# Altium PCB mcu.PcbDoc
Units mm, origin at the board's own origin, x right, y up, seen from the top; angles counter-clockwise.
Board outline 100 x 100 mm, 2 copper layers (Top Layer, Bottom Layer); 49 components, 82 nets, 308 pads, 0 vias.
Unrouted connection lines stored in the file: 205.
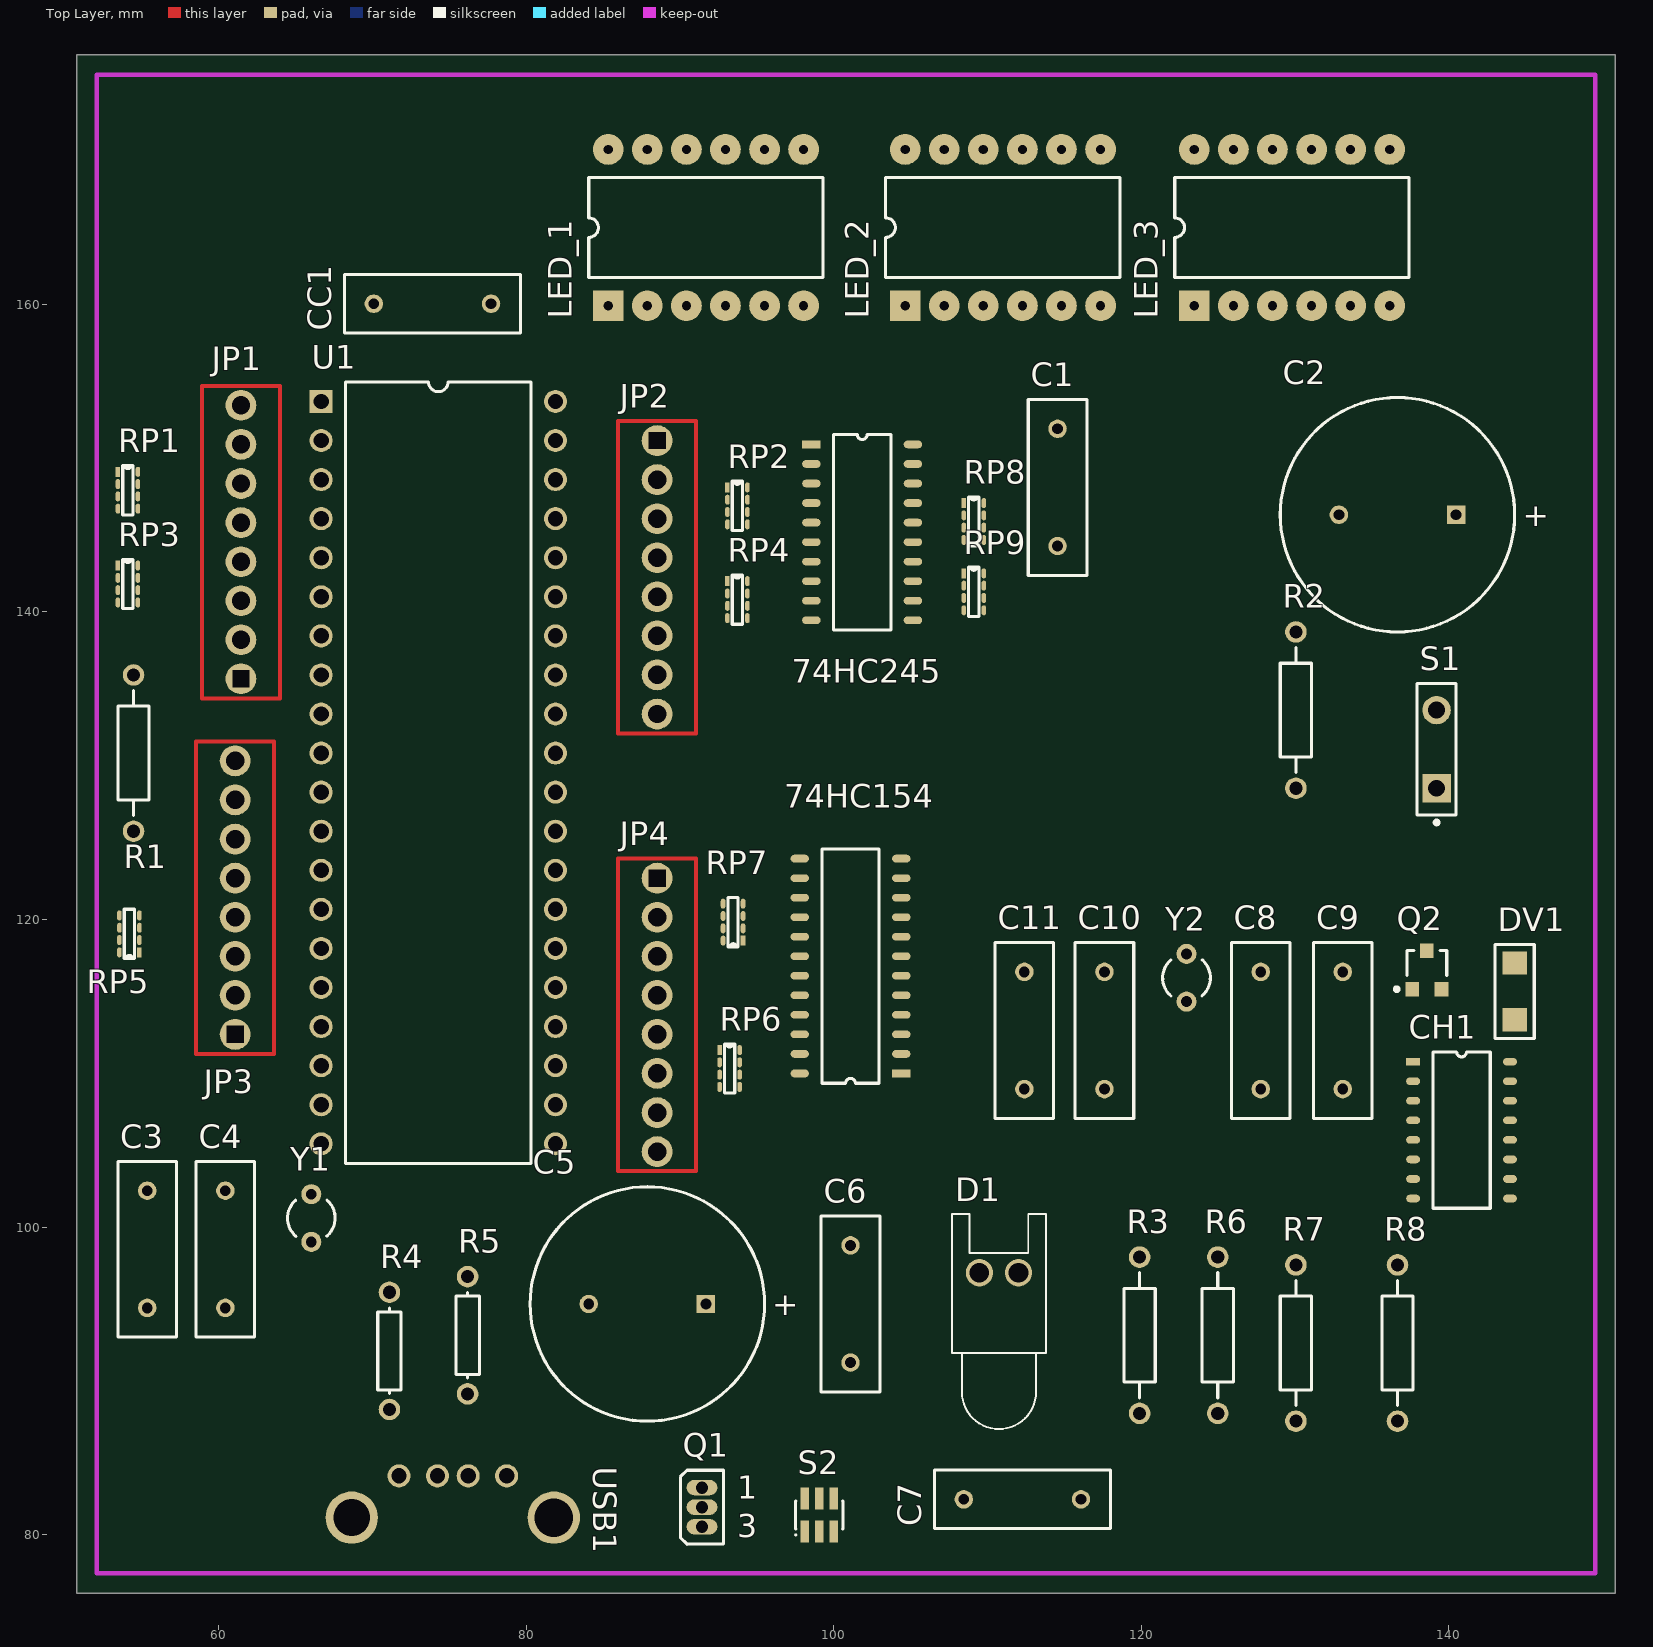
[diagram p0: Top Layer view]
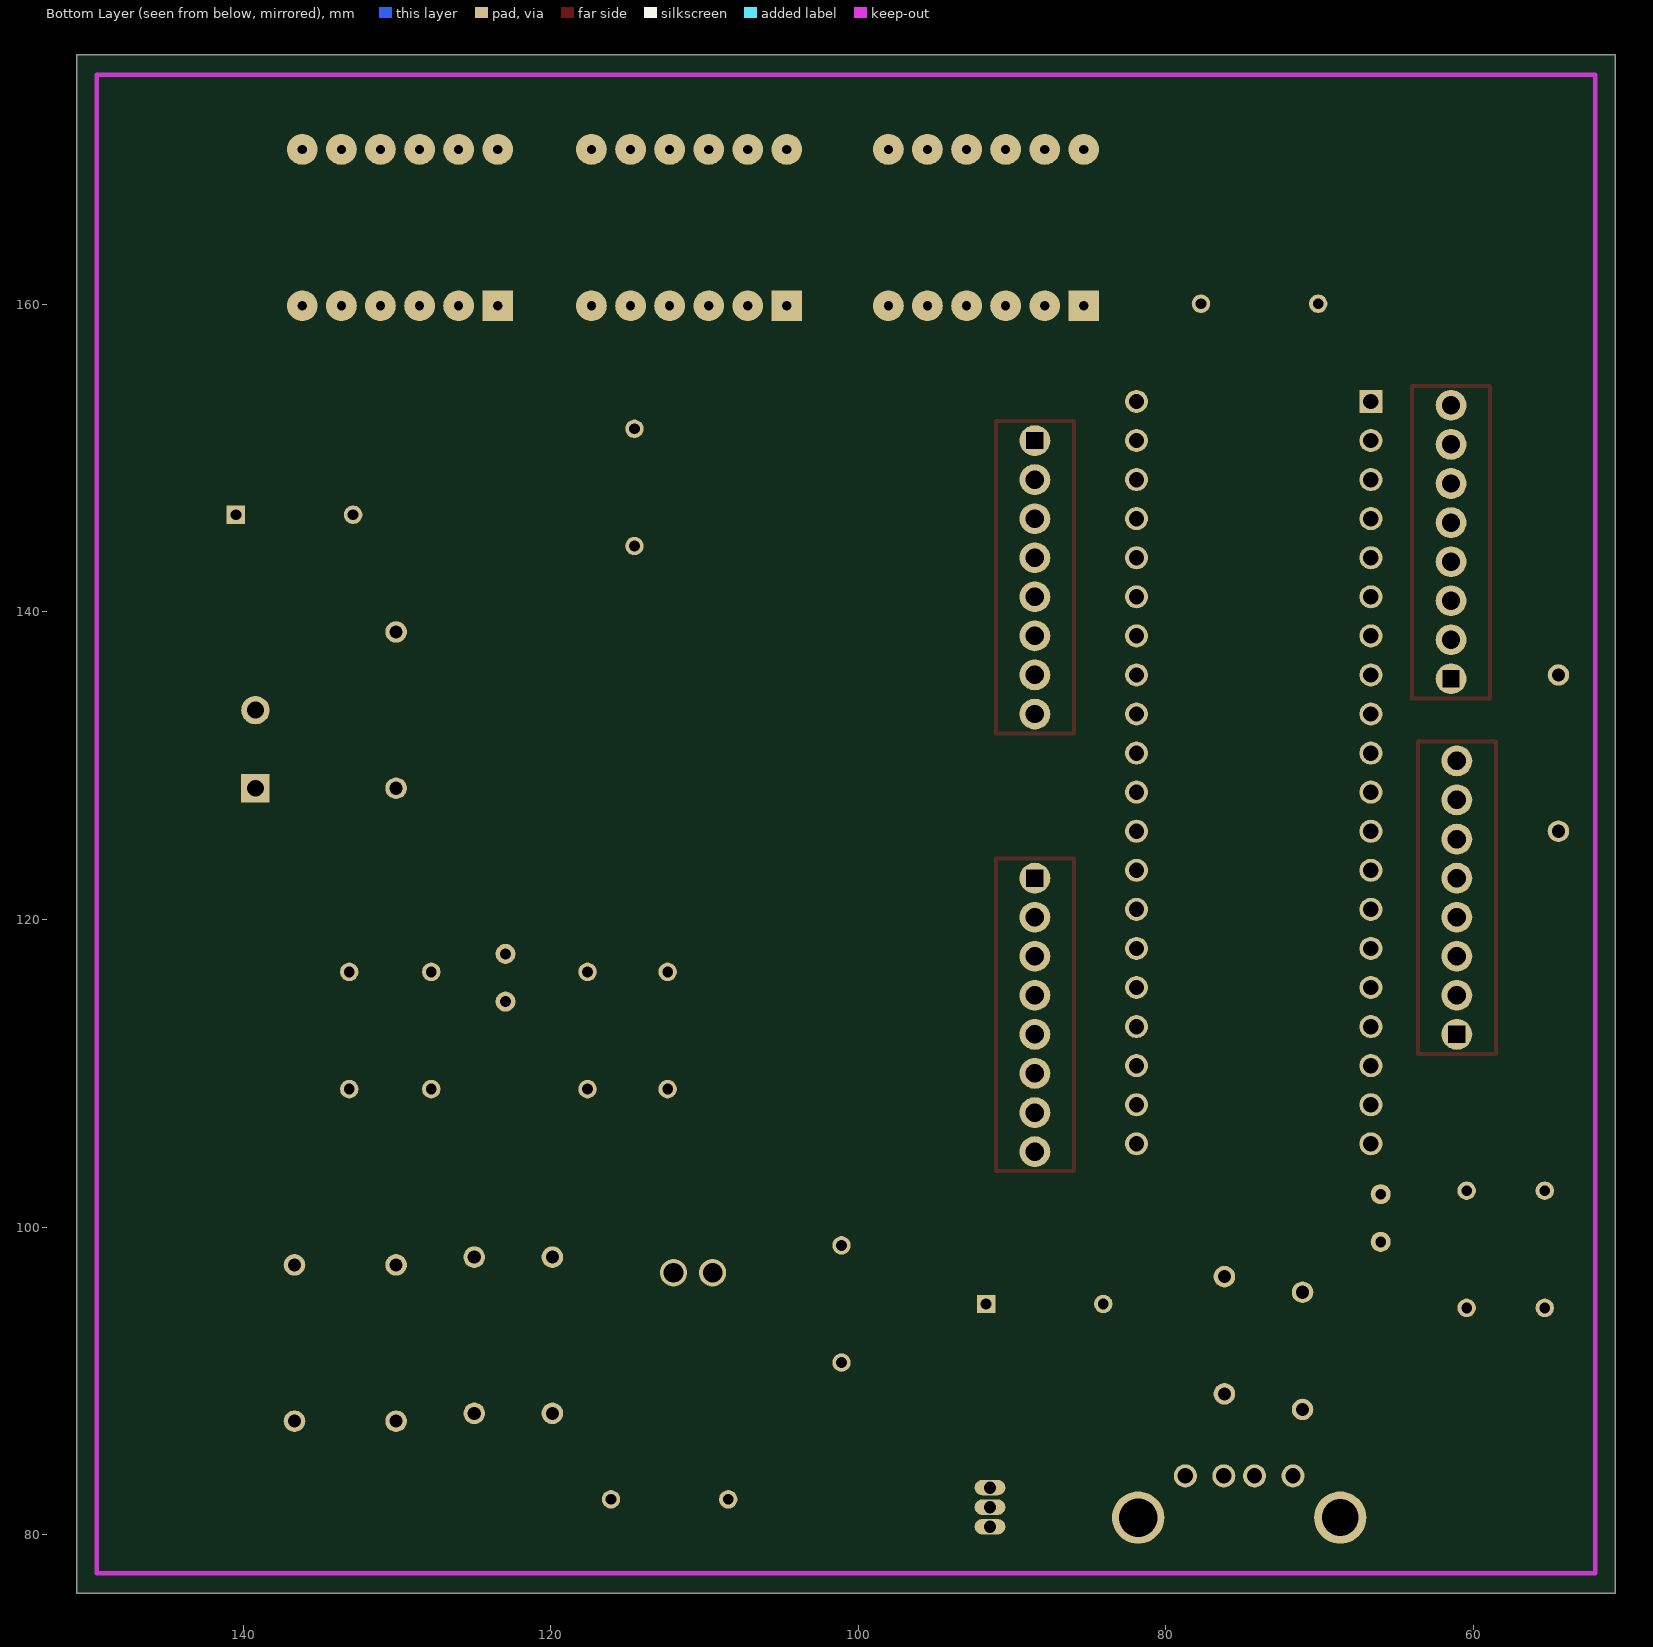
[diagram p1: Bottom Layer view, seen from below]

## Layer stack, top to bottom
Top Layer: signal copper 0.0356
Dielectric: dielectric 0.32, FR-4, Dk 4.8
Bottom Layer: signal copper 0.0356

## Board outline
50.8,76.2 150.8,76.2 150.8,176.2 50.8,176.2

## Design rules (kind name [scope] priority, off if disabled: settings)
Clearance [All] p1: gap=0.2
PolygonConnect [All] p1: connectstyle=Relief reliefconductorwidth=0.254 reliefentries=4 polygonreliefangle="90 Angle"
RoutingVias [All] p1: holewidth=0.6 width=1 viastyle="Through Hole" minholewidth=0.711 minwidth=1.27 maxholewidth=0.711 maxwidth=1.27
SilkscreenOverComponentPads [All] p1: minsilkscreentomaskgap=0.254
SolderMaskExpansion [All] p1: expansion=0.102
TestPointUsage [All] p1: valid=0 allowmultiple=FALSE
Testpoint [All] p1: side=15 testpointundercomponent=TRUE minsize=1.016 maxsize=2.54 preferedsize=1.524 minholesize=0 maxholesize=1.016 preferedholesize=0.813 testpointgrid=0.025 style=1023 order=0123456789
Width [All] p1: maxlimit=0.2 minlimit=0.2 preferedwidth=0.2
23 further rules are at their usual default settings.

## Components (designator, comment, footprint, x,y, rotation, side; value= is the part's Value field where it differs from the comment)
74HC154 "74HC154" SOP24-74HC154D 104.394,109.982 r180 top
74HC245 "74HC245" SOP20-74HC245 98.552,150.876 r0 top
C1 "Cap" RAD-0.3 114.554,148.082 r90 top
C2 "Cap Pol1" RB7.6-15 136.652,146.304 r0 top
C3 "Cap" RAD-0.3 55.372,98.552 r90 top
C4 "Cap" RAD-0.3 60.452,98.552 r90 top
C5 "Cap Pol1" RB7.6-15 87.884,94.996 r0 top
C6 "Cap" RAD-0.3 101.092,94.996 r90 top
C7 "Cap" RAD-0.3 112.268,82.296 r180 top
C8 "Cap" RAD-0.3 127.762,112.776 r90 top
C9 "Cap" RAD-0.3 133.096,112.776 r90 top
C10 "Cap" RAD-0.3 117.602,112.776 r90 top
C11 "Cap" RAD-0.3 112.395,112.776 r90 top
CC1 "Cap" RAD-0.3 73.914,160.02 r180 top
CH1 "CH340G" SOP16-CH1-CH340G 137.668,110.744 r0 top
D1 "LED0" LED-0 110.744,97.028 r0 top
DV1 "SS14-肖特基二极管" DV1-SS14 144.272,115.316 r90 top
JP1 "JP1" JP 61.468,135.636 r180 top
JP2 "JP1" JP 88.519,151.13 r0 top
JP3 "JP1" JP 61.087,112.522 r180 top
JP4 "JP1" JP 88.519,122.682 r0 top
LED_1 "LED_12" LED_12 85.344,159.893 r90 top
LED_2 "LED_12" LED_12 104.648,159.893 r90 top
LED_3 "LED_12" LED_12 123.444,159.893 r90 top
Q1 "MOSFET-P" E3 91.44,81.788 r0 top
Q2 "QNPN" SOT-23B 138.557,116.713 r0 top
R1 "Res2" AXIAL-0.4 54.483,130.81 r270 top
R2 "Res2" AXIAL-0.4 130.048,133.604 r90 top
R3 "Res2" AXIAL-0.4 119.888,92.964 r90 top
R4 "33R" AXIAL-0.3 71.12,91.948 r90 top
R5 "33R" AXIAL-0.3 76.2,92.964 r90 top
R6 "Res2" AXIAL-0.4 124.968,92.964 r90 top
R7 "Res2" AXIAL-0.4 130.048,92.456 r90 top
R8 "Res2" AXIAL-0.4 136.652,92.456 r90 top
RP1 "RP1" RP-8P4R-0603 53.467,149.098 r0 top
RP2 "RP1" RP-8P4R-0603 93.091,148.082 r0 top
RP3 "RP1" RP-8P4R-0603 53.467,143.002 r0 top
RP4 "RP1" RP-8P4R-0603 93.091,141.986 r0 top
RP5 "RP1" RP-8P4R-0603 54.864,117.856 r180 top
RP6 "RP1" RP-8P4R-0603 92.583,111.506 r0 top
RP7 "RP1" RP-8P4R-0603 94.107,118.618 r180 top
RP8 "RP1" RP-8P4R-0603 108.458,147.066 r0 top
RP9 "RP1" RP-8P4R-0603 108.458,142.494 r0 top
S1 "SW-PB" SPST-2 139.192,131.064 r90 top
S2 "SW DPDT" SOT23-6 99.06,81.28 r0 top
U1 "AT89C52" CPU_DIP40 66.675,153.67 r0 top
USB1 "USB1" USB1 78.74,83.82 r0 top
Y1 "XTA1" R38 66.04,100.584 r0 top
Y2 "XTAL" R38 122.936,116.205 r0 top

## Footprints (in the part's own frame and the unit in brackets; to place one, negate y for a bottom-side part, rotate by r counter-clockwise, add the part's x,y. Pads: shape width x height; smd on the part's side, far side on the other; paste and mask are expansions set on the pad)
AXIAL-0.3 [mm] "Resistor; 2 Leads"
  round 1.4 hole 0.85: 1(-3.81,0) 2(3.81,0)
  silkscreen extent -2.77,-0.76 2.77,0.76
AXIAL-0.4 [mm] "Resistor; 2 Leads"
  round 1.4 hole 0.85: 1(-5.08,0) 2(5.08,0)
  silkscreen extent -4.06,-1.02 4.06,1.02
CPU_DIP40 [mm]
  rect 1.5x1.5 hole 1: 1(0,0)
  round 1.5 hole 1: 2(0,-2.54) 3(0,-5.08) 4(0,-7.62) 5(0,-10.16) 6(0,-12.7) 7(0,-15.24) 8(0,-17.78) 9(0,-20.32) 10(0,-22.86) 11(0,-25.4) 12(0,-27.94) 13(0,-30.48) 14(0,-33.02) 15(0,-35.56) 16(0,-38.1) 17(0,-40.64) 18(0,-43.18) 19(0,-45.72) 20(0,-48.26) 21(15.24,-48.26) 22(15.24,-45.72) 23(15.24,-43.18) 24(15.24,-40.64) 25(15.24,-38.1) 26(15.24,-35.56) 27(15.24,-33.02) 28(15.24,-30.48) 29(15.24,-27.94) 30(15.24,-25.4) 31(15.24,-22.86) 32(15.24,-20.32) 33(15.24,-17.78) 34(15.24,-15.24) 35(15.24,-12.7) 36(15.24,-10.16) 37(15.24,-7.62) 38(15.24,-5.08) 39(15.24,-2.54) 40(15.24,0)
  silkscreen extent 1.59,-49.53 13.65,1.27
DV1-SS14 [mm]
  rect 1.52x1.6 smd: 1(-1.85,0) 2(1.85,0)
  silkscreen extent -3.05,-1.27 3.05,1.27
E3 [mm] "TO, Flat Index; 3 In-Line, Axial Leads; Body Dia. 4.6mm; Lead Dia. 0.5 mm (max)"
  oval 2x1 hole 0.8: 1(0,1.27) 2(0,0) 3(0,-1.27)
  silkscreen extent -1.41,-2.41 1.41,2.41
JP [mm]
  round 2 hole 1.1 square: 1(0,0)
  round 2 hole 1.2: 2(0,-2.54) 3(0,-5.08) 4(0,-7.62) 5(0,-10.16) 6(0,-12.7) 7(0,-15.24) 8(0,-17.78)
  Top Layer lines w0.254: 2.54,1.27 2.54,-19.05 -2.54,-19.05 -2.54,1.27 2.54,1.27
LED-0 [mil] "Typical INFRARED GaAs LED; 2 Leads"
  round 70 hole 50: 1(50,0) 2(-50,0)
  silkscreen extent -120,-400 120,150
LED_12 [mm]
  rect 2x2 hole 0.6: 1(0,0)
  round 2 hole 0.6: 2(0,-2.54) 3(0,-5.08) 4(0,-7.62) 5(0,-10.16) 6(0,-12.7) 7(10.16,-12.7) 8(10.16,-10.16) 9(10.16,-7.62) 10(10.16,-5.08) 11(10.16,-2.54) 12(10.16,0)
  silkscreen extent 1.83,-13.97 8.33,1.27
R38 [mm] "Crystal, Thru-Hole; 2 Leads; Body 3.1 x 8.2 mm (Dia.xH)"
  round 1.3 hole 0.7: 1(0,1.55) 2(0,-1.55)
  silkscreen extent -1.55,-1.19 1.55,1.17
RAD-0.3 [mm] "Capacitor; 2 Leads"
  round 1.2 hole 0.7: 1(-3.81,0) 2(3.81,0)
  silkscreen extent -5.71,-1.91 5.71,1.91
RB7.6-15 [mm] "Polarized Capacitor (Radial); 2 Leads"
  rect 1.2x1.2 hole 0.7: 1(3.81,0)
  round 1.2 hole 0.7: 2(-3.81,0)
  silkscreen extent -7.62,-7.62 7.62,7.62
RP-8P4R-0603 [mm]
  rect 0.3x0.65 smd: 1(0,0)
  oval 0.3x0.65 smd: 2(0,-0.8) 3(0,-1.6) 4(0,-2.4) 5(1.3,-2.4) 6(1.3,-1.6) 7(1.3,-0.8) 8(1.3,0)
  silkscreen extent 0.32,-2.8 0.99,0.4
SOP16-CH1-CH340G [mm]
  rect 0.9x0.5 smd: 1(0,0)
  oval 0.9x0.5 smd: 2(0,-1.27) 3(0,-2.54) 4(0,-3.81) 5(0,-5.08) 6(0,-6.35) 7(0,-7.62) 8(0,-8.89) 9(6.3,-8.89) 10(6.3,-7.62) 11(6.3,-6.35) 12(6.3,-5.08) 13(6.3,-3.81) 14(6.3,-2.54) 15(6.3,-1.27) 16(6.3,0)
  silkscreen extent 1.28,-9.53 5.02,0.64
SOP20-74HC245 [mm]
  rect 1.2x0.5 smd: 1(0,0)
  oval 1.2x0.5 smd: 2(0,-1.27) 3(0,-2.54) 4(0,-3.81) 5(0,-5.08) 6(0,-6.35) 7(0,-7.62) 8(0,-8.89) 9(0,-10.16) 10(0,-11.43) 11(6.6,-11.43) 12(6.6,-10.16) 13(6.6,-8.89) 14(6.6,-7.62) 15(6.6,-6.35) 16(6.6,-5.08) 17(6.6,-3.81) 18(6.6,-2.54) 19(6.6,-1.27) 20(6.6,0)
  silkscreen extent 1.43,-12.06 5.16,0.64
SOP24-74HC154D [mm]
  rect 1.2x0.5 smd: 1(0,0)
  oval 1.2x0.5 smd: 2(0,-1.27) 3(0,-2.54) 4(0,-3.81) 5(0,-5.08) 6(0,-6.35) 7(0,-7.62) 8(0,-8.89) 9(0,-10.16) 10(0,-11.43) 11(0,-12.7) 12(0,-13.97) 13(6.6,-13.97) 14(6.6,-12.7) 15(6.6,-11.43) 16(6.6,-10.16) 17(6.6,-8.89) 18(6.6,-7.62) 19(6.6,-6.35) 20(6.6,-5.08) 21(6.6,-3.81) 22(6.6,-2.54) 23(6.6,-1.27) 24(6.6,0)
  silkscreen extent 1.43,-14.6 5.16,0.64
SOT23-6 [mm] "SOT-23/SC-74A; 5 Leads; Body 3.1 x 3 mm, inc. leads (LxW max)"
  rect 0.55x1.45 smd: 1(-0.95,-1.075) 2(0,-1.075) 3(0.95,-1.075) 4(0.95,1.075) 5(0,1.075) 6(-0.95,1.075)
  silkscreen extent -1.57,-1.35 1.55,0.9
SOT-23B [mm] "SOT-23; 3 Leads; Body 3.0 x 2.6 mm, inc. leads (LxW max)"
  rect 0.9x0.95 smd: 1(-0.95,-1.25) 2(0.95,-1.25) 3(0,1.25)
  silkscreen extent -2.07,-1.37 1.3,1.25
SPST-2 [mm] "Circuit Breaker; 2 Leads"
  rect 1.85x1.85 hole 1.1: 1(-2.54,0)
  round 1.85 hole 1.1: 2(2.54,0)
  silkscreen extent -4.89,-1.27 4.28,1.27
USB1 [mm]
  round 1.5 hole 1: 1(0,0) 2(-2.5,0) 3(-4.5,0) 4(-7,0)
  round 3.4 hole 2.4: 5(-10.07,-2.71)
  round 3.4 hole 2.5: 6(3.07,-2.71)

## Part data
C1 C3 C4 C6 C7 C8 C9 C10 C11 CC1: "Capacitor"
C2 C5: "Polarized Capacitor (Radial)"
CH1: library part CH1, "CH1"
D1: "Typical INFRARED GaAs LED"
DV1: library part DV1, "DV1"
Q1: "P-Channel MOSFET"
Q2: "NPN Bipolar Transistor"
R1 R2 R3 R6 R7 R8: "Resistor"
R4 R5: library part Res1, "Resistor"
S1 S2: "Switch"
Y1: library part XTAL, "Crystal Oscillator"
Y2: "Crystal Oscillator"

## Nets (pads, with @x,y where several pads share a name; then routed paths per layer and width w, separated by ;. In a path a pad name is that pad's centre, name@x,y a point inside that pad or via, vN(x,y) a via of type N, cw(c..) or ccw(c..) an arc to the next point about the centre after c; other vN are vias at no path point)
+5V: C7.1 C8.1 CH1.16
D+: CH1.5 R5.2
D-: CH1.6 R4.2
GND: 74HC154.12 74HC154.18 74HC154.19 74HC245.10 74HC245.19 C1.1 C3.1 C4.1 C5.2 C6.2 C7.2 C8.2 C9.1 C10.1 C11.1 CC1.2 CH1.1 D1.2 R2.2 R7.2 U1.20 USB1.1 USB1.5
LED1: 74HC154.1 LED_1.12
LED2: 74HC154.2 LED_1.9
LED3: 74HC154.3 LED_1.8
LED4: 74HC154.4 LED_1.6
LED5: 74HC154.5 LED_2.12
LED6: 74HC154.6 LED_2.9
LED7: 74HC154.7 LED_2.8
LED8: 74HC154.8 LED_2.6
LED9: 74HC154.9 LED_3.12
LED10: 74HC154.10 LED_3.9
LED11: 74HC154.11 LED_3.8
LED12: 74HC154.13 LED_3.6
Net74HC245_11: 74HC245.11 RP9.4
Net74HC245_12: 74HC245.12 RP9.3
Net74HC245_13: 74HC245.13 RP9.2
Net74HC245_14: 74HC245.14 RP9.1
Net74HC245_15: 74HC245.15 RP8.4
Net74HC245_16: 74HC245.16 RP8.3
Net74HC245_17: 74HC245.17 RP8.2
Net74HC245_18: 74HC245.18 RP8.1
NetC5_1: C5.1 C6.1 S2.1 S2.5 USB1.4
NetC9_2: C9.2 CH1.4
NetC10_2: C10.2 CH1.7 Y2.1
NetC11_2: C11.2 CH1.8 Y2.2
NetCH1_2: CH1.2 DV1.2
NetCH1_13: CH1.13 Q2.3
NetCH1_14: CH1.14 R8.1
NetD1_1: D1.1 R3.2
NetLED_1_1: LED_1.1 LED_2.1 LED_3.1 RP9.8
NetLED_1_2: LED_1.2 LED_2.2 LED_3.2 RP8.5
NetLED_1_3: LED_1.3 LED_2.3 LED_3.3 RP9.5
NetLED_1_4: LED_1.4 LED_2.4 LED_3.4 RP8.6
NetLED_1_5: LED_1.5 LED_2.5 LED_3.5 RP9.6
NetLED_1_7: LED_1.7 LED_2.7 LED_3.7 RP8.7
NetLED_1_10: LED_1.10 LED_2.10 LED_3.10 RP9.7
NetLED_1_11: LED_1.11 LED_2.11 LED_3.11 RP8.8
NetQ1_2: Q1.2 R6.2 R7.1
NetQ1_3: Q1.3 S2.4
NetQ2_1: Q2.1 R6.1
NetQ2_2: Q2.2 R8.2
NetR4_1: R4.1 USB1.3
NetR5_1: R5.1 USB1.2
P00: 74HC245.2 JP2.1 RP2.8 U1.39
P01: 74HC245.3 JP2.2 RP2.7 U1.38
P02: 74HC245.4 JP2.3 RP2.6 U1.37
P03: 74HC245.5 JP2.4 RP2.5 U1.36
P04: 74HC245.6 JP2.5 RP4.8 U1.35
P05: 74HC245.7 JP2.6 RP4.7 U1.34
P06: 74HC245.8 JP2.7 RP4.6 U1.33
P07: 74HC245.9 JP2.8 RP4.5 U1.32
P10: JP1.8 RP1.8 U1.1
P11: JP1.7 RP1.7 U1.2
P12: JP1.6 RP1.6 U1.3
P13: JP1.5 RP1.5 U1.4
P14: JP1.4 RP3.8 U1.5
P15: JP1.3 RP3.7 U1.6
P16: JP1.2 RP3.6 U1.7
P17: JP1.1 RP3.5 U1.8
P20: JP4.8 RP6.8 U1.21
P21: JP4.7 RP6.7 U1.22
P22: 74HC154.23 JP4.6 RP6.6 U1.23
P23: 74HC154.22 JP4.5 RP6.5 U1.24
P24: 74HC154.21 JP4.4 RP7.8 U1.25
P25: 74HC154.20 JP4.3 RP7.7 U1.26
P26: JP4.2 RP7.6 U1.27
P27: JP4.1 RP7.5 U1.28
P30: JP3.8 U1.10
P31: JP3.7 U1.11
P32: JP3.6 R1.2 U1.12
P33: JP3.5 RP5.5 U1.13
P34: JP3.4 U1.14
P35: JP3.3 RP5.6 U1.15
P36: JP3.2 RP5.7 U1.16
P37: JP3.1 RP5.8 U1.17
RST: C2.2 R2.1 S1.2 U1.9
VCC: 74HC154.24 74HC245.1 74HC245.20 C1.2 C2.1 CC1.1 Q1.1 R1.1 R3.1 RP1.1 RP1.2 RP1.3 RP1.4 RP2.1 RP2.2 RP2.3 RP2.4 RP3.1 RP3.2 RP3.3 RP3.4 RP4.1 RP4.2 RP4.3 RP4.4 RP6.1 RP6.2 RP6.3 RP6.4 RP7.1 RP7.2 RP7.3 RP7.4 S1.1 U1.31 U1.40
XT1: C3.2 U1.19 Y1.1
XT2: C4.2 U1.18 Y1.2
pads on no net: 74HC154.14 74HC154.15 74HC154.16 74HC154.17 CH1.3 CH1.9 CH1.10 CH1.11 CH1.12 CH1.15 DV1.1 RP5.1 RP5.2 RP5.3 RP5.4 S2.2 S2.3 S2.6 U1.29 U1.30 USB1.6

## Keep-outs
Keep-Out Layer:
  lines w0.3: 52.1,77.5 52.1,174.9 149.5,174.9 149.5,77.5 52.1,77.5

## Text inside footprints (layer, text, board x,y; h text height)
C2: Top Overlay "+" at 144.784,145.567 h1.5
C5: Top Overlay "+" at 96.016,94.259 h1.5
Q1: Top Overlay "1" at 93.715,82.343 h1.5; Top Overlay "3" at 93.715,79.825 h1.5